# Altium PCB T4F81.PcbDoc
Units mm, origin at the board's own origin, x right, y up, seen from the top; angles counter-clockwise.
Board outline 40 x 55 mm, 4 copper layers (Top Layer, GND, PWR, Bottom Layer), stack 0.999 mm thick; 58 components, 90 nets, 333 pads, 22 vias.
Unrouted connection lines stored in the file: 201.
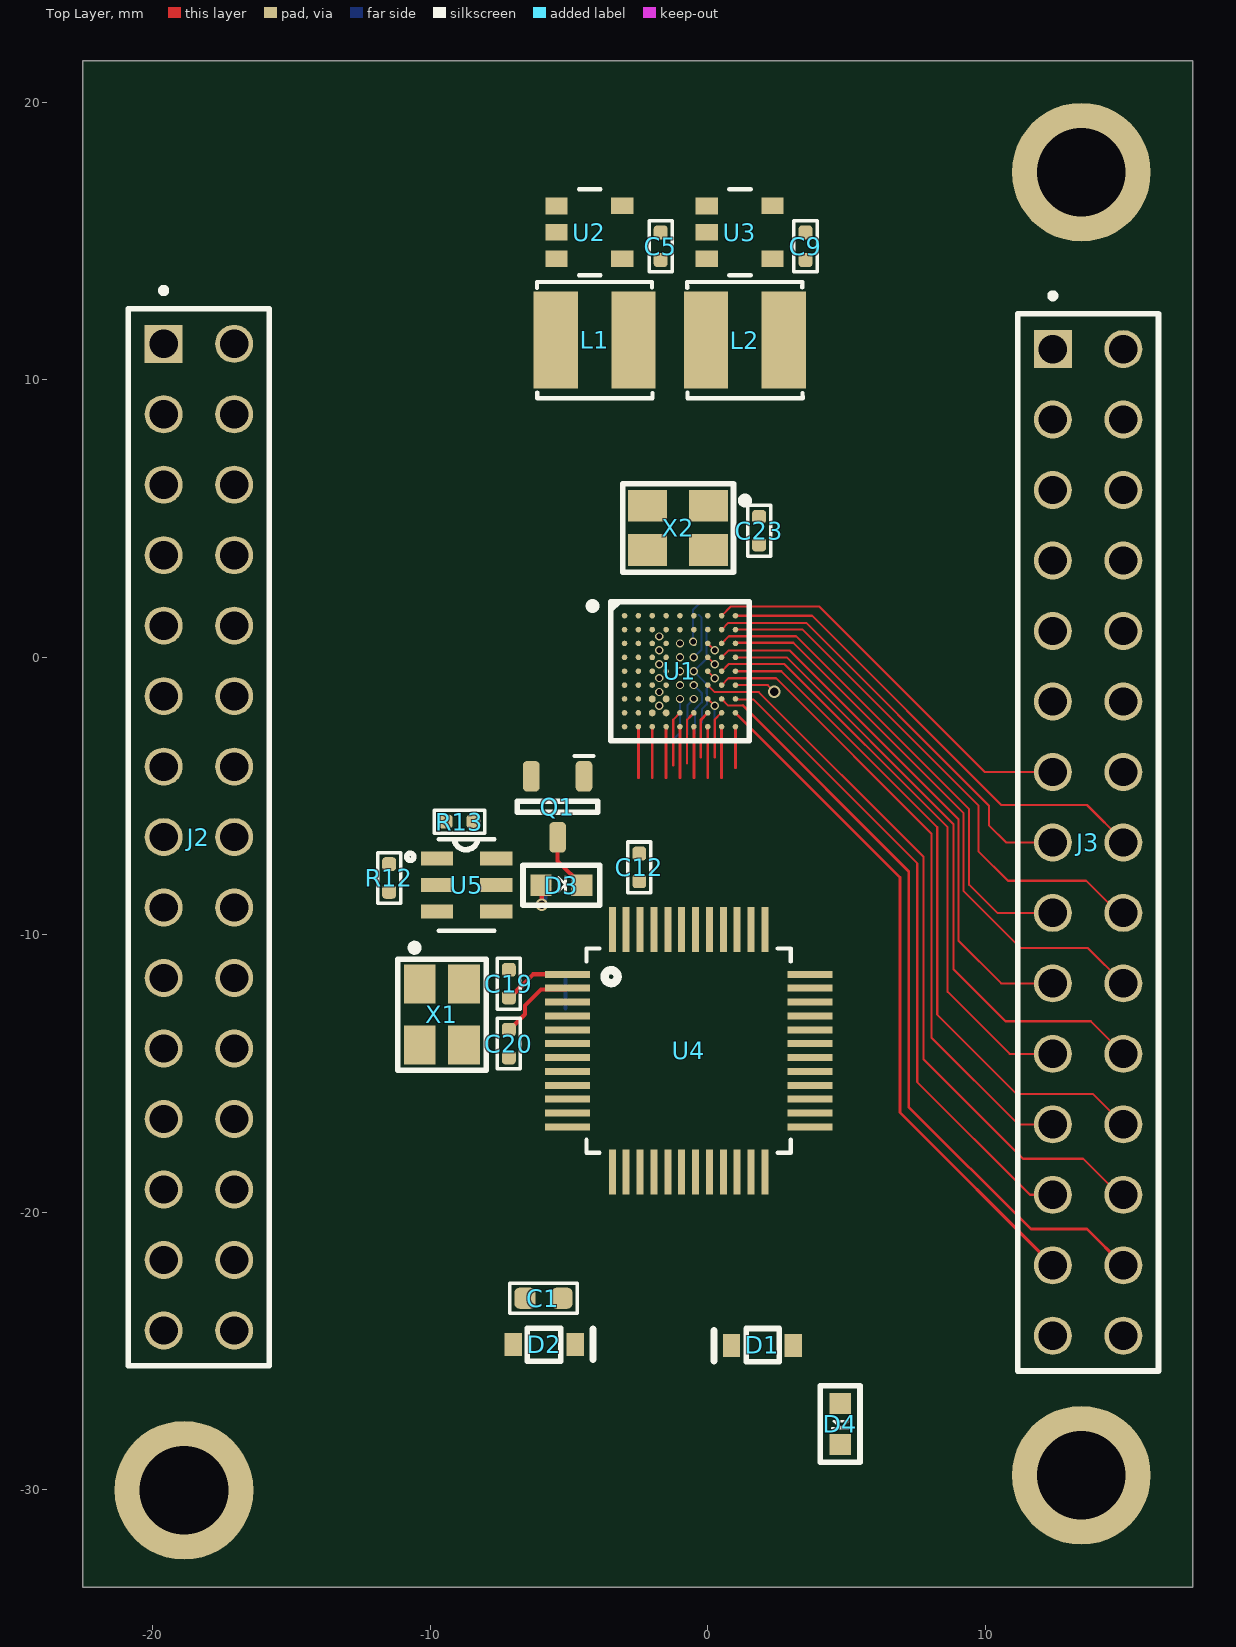
[diagram p0: Top Layer view]
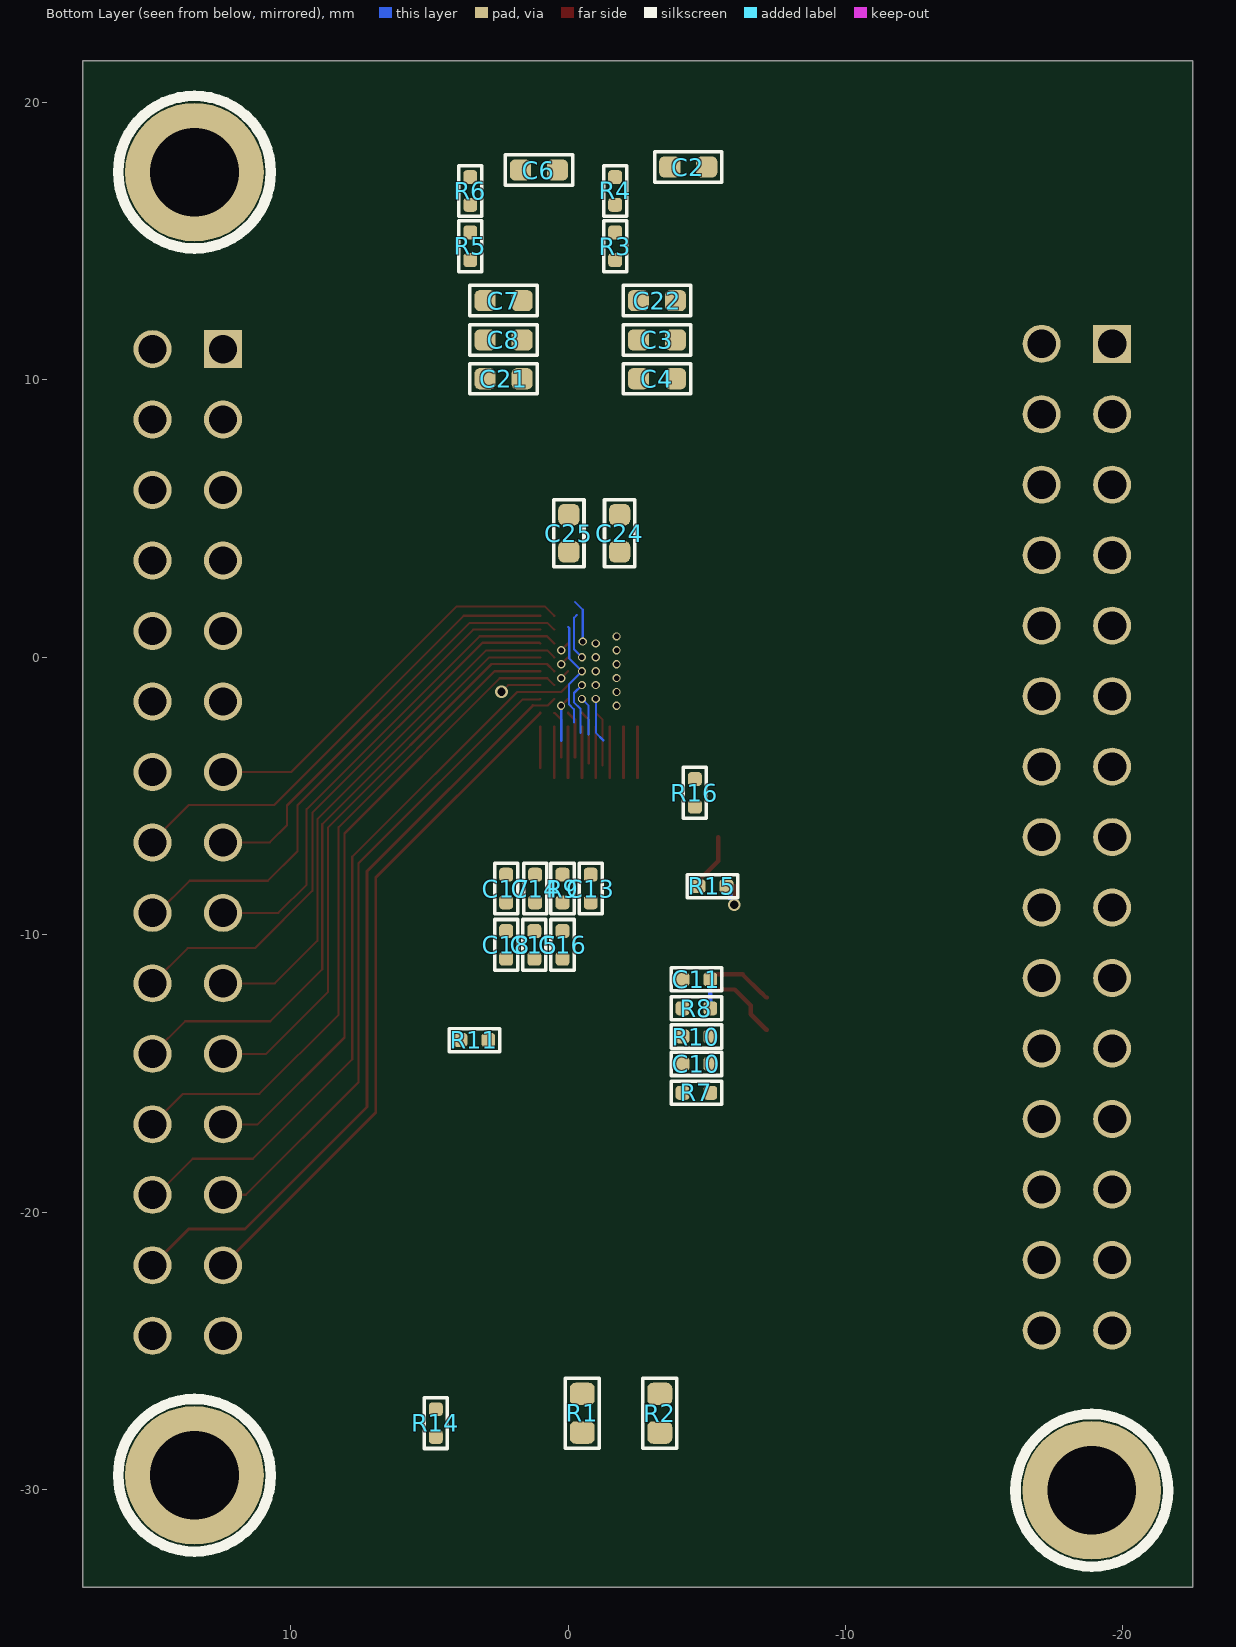
[diagram p1: Bottom Layer view, seen from below]

## Layer stack, top to bottom
Top Solder: solder mask 0.0102, Solder Resist, Dk 3.5
Top Layer: signal copper 0.035
Dielectric 2: prepreg 0.0994, PP-006, Dk 4.1
GND: signal copper 0.0152
Dielectric 1: prepreg 0.7, FR-4, Dk 4.8
PWR: signal copper 0.0152
Dielectric 3: prepreg 0.0994, PP-006, Dk 4.1
Bottom Layer: signal copper 0.035
Bottom Solder: solder mask 0.0102, Solder Resist, Dk 3.5

## Board outline
-22.517,-33.507 17.483,-33.507 17.483,21.493 -22.517,21.493

## Design rules (kind name [scope] priority, off if disabled: settings)
Clearance [All] p1: gap=0.102 ignorepadtopadclearanceinfootprint=TRUE
PolygonConnect [All] p1: connectstyle=Relief reliefconductorwidth=0.254 reliefentries=4 polygonreliefangle="90 Angle" airgapwidth=0.254
RoutingVias [All] p1: holewidth=0.711 width=1.27 viastyle="Through Hole" minholewidth=0.711 minwidth=1.27 maxholewidth=0.711 maxwidth=1.27
SolderMaskExpansion [All] p1: expansion=0.051 istentingtop=FALSE
Width [All] p1: maxlimit=0.508 minlimit=0.076 preferedwidth=0.254 minimp=50.000000 maximp=50.000000 favimp=50.000000
30 further rules are at their usual default settings.

## Classes and differential pairs
component class T4F81_FPGA: C10 C11 C12 C13 C14 C15 C16 C17 C18 C19 C20 C23 D3 J2 J3 Q1 R7 R8 R9 R10 R11 R12 R13 R15 R16 U1 U4 U5 X1 X2
component class Power: C1 C2 C3 C4 C5 C6 C7 C8 C9 C21 C22 C24 C25 D1 D2 D4 J1 L1 L2 R1 R2 R3 R4 R5 R6 R14 U2 U3

## Components (designator, comment, footprint, x,y, rotation, side; value= is the part's Value field where it differs from the comment)
C1 "Capacitor" CAPC0603 -5.924,-23.098 r180 top value=10uF
C2 "" CAPC0603 -4.331,17.67 r180 bottom value=22uF
C3 "" CAPC0603 -3.206,11.438 r0 bottom value=22uF
C4 "" CAPC0603 -3.206,10.04 r0 bottom value=22uF
C5 "" CAPC0402 -1.697,14.816 r270 top value=22pF
C6 "" CAPC0603 1.052,17.563 r180 bottom value=22uF
C7 "" CAPC0603 2.322,12.855 r0 bottom value=22uF
C8 "" CAPC0603 2.322,11.438 r0 bottom value=22uF
C9 "" CAPC0402 3.524,14.815 r270 top value=22pF
C10 "" CAPC0402 -4.626,-14.656 r180 bottom value=0.1uF
C11 "" CAPC0402 -4.626,-11.608 r180 bottom value=0.1uF
C12 "" CAPC0402 -2.467,-7.571 r270 top value=0.1uF
C13 "" CAPC0402 -0.816,-8.333 r270 bottom value=0.1uF
C14 "" CAPC0402 1.189,-8.333 r270 bottom value=10nF
C15 "" CAPC0402 1.216,-10.365 r90 bottom value=4.7uF
C16 "" CAPC0402 0.2,-10.365 r90 bottom value=0.1uF
C17 "" CAPC0402 2.232,-8.333 r270 bottom value=0.1uF
C18 "" CAPC0402 2.232,-10.365 r90 bottom value=0.1uF
C19 "" CAPC0402 -7.166,-11.762 r270 top value=22pF
C20 "" CAPC0402 -7.166,-13.921 r90 top value=22pF
C21 "" CAPC0603 2.322,10.04 r0 bottom value=22uF
C22 "" CAPC0603 -3.206,12.855 r0 bottom value=22uF
C23 "" CAPC0402 1.85,4.566 r270 top value=15pF
C24 "" CAPC0603 -1.861,4.472 r270 bottom value=22uF
C25 "" CAPC0603 -0.027,4.472 r270 bottom value=22uF
D1 "DIODE_B5819WS" sod-323 1.971,-24.8 r180 top
D2 "DIODE_B5819WS" sod-323 -5.888,-24.764 r0 top
D3 "" led_0603 -5.278,-8.212 r0 top
D4 "" led_0603 4.776,-27.632 r270 top
J1 "TYPE-C" TYPE-C 34.762,-16.915 r0 top
J2 "Header 15X2 2.54mm" Header_15X2_2.54 -19.608,11.301 r270 top
J3 "Header 15X2 2.54mm" Header_15X2_2.54 12.437,11.109 r270 top
L1 "IND_1" IND_4.0X4.0X2.0 -4.075,11.432 r0 top value=2.2uH
L2 "IND_1" IND_4.0X4.0X2.0 1.339,11.432 r0 top value=2.2uH
Q1 "" SOT23-3 -5.411,-5.414 r180 top
R1 "Resistor" RESC0603 -0.511,-27.245 r90 bottom value=4.7K
R2 "Resistor" RESC0603 -3.305,-27.245 r90 bottom value=4.7K
R3 "Res1" resc0402 -1.697,14.816 r90 bottom value=9k
R4 "Res1" resc0402 -1.697,16.809 r90 bottom value=2k
R5 "Res1" resc0402 3.524,14.816 r90 bottom value=1.2kohm
R6 "Res1" resc0402 3.524,16.809 r90 bottom value=1K
R7 "Res1" resc0402 -4.626,-15.699 r0 bottom value=0OHM
R8 "Res1" resc0402 -4.626,-12.651 r0 bottom value=0OHM
R9 "Res1" RESC0402 0.2,-8.333 r270 bottom value=10k
R10 "Res1" resc0402 -4.626,-13.667 r180 bottom value=12k
R11 "Res1" CAPC0402 3.375,-13.794 r0 bottom value=39K
R12 "Res1" resc0402 -11.484,-7.952 r270 top value=2k
R13 "Res1" resc0402 -8.944,-5.92 r180 top value=10k
R14 "Res1" resc0402 4.766,-27.6 r270 bottom value=2K
R15 "" RESC0402 -5.205,-8.251 r0 bottom value=240E
R16 "" RESC0402 -4.571,-4.885 r270 bottom value=1k
U1 "T4F81" "T4F81 fpga" -1,-0.5 r0 top
U2 "AP3429" SOT23-5 -4.202,15.242 r0 top
U3 "AP3429" SOT23-5 1.212,15.242 r0 top
U4 "FTDI" LQFP-48 -0.689,-14.175 r0 top
U5 "93LC56BT-I/OT" SOT23-6 -8.69,-8.206 r0 top
X1 "XC2426TR-ND" Crystal_3225 -9.579,-12.878 r270 top
X2 "Oscillator OT322550MJBA4SL" Crystal_3225 -1.071,4.663 r180 top

## Footprints (in the part's own frame and the unit in brackets; to place one, negate y for a bottom-side part, rotate by r counter-clockwise, add the part's x,y. Pads: shape width x height; smd on the part's side, far side on the other; paste and mask are expansions set on the pad)
CAPC0402 [mm]
  rrect50% 0.5x0.5 smd: 1(-0.5,0) 2(0.5,0)
  silkscreen extent -0.92,-0.42 0.92,0.42, body extent -0.5,-0.25 0.5,0.25, height 0.42
CAPC0603 [mil]
  rrect50% 30x30 smd: 1(-26.26,0) 2(26.26,0)
  silkscreen extent -48,-22 48,22, body extent -31,-16 32,16, height 34
Crystal_3225 [mm] "3225 pack"
  rect 1.4x1.15 smd: 1(-1.1,-0.8) 2(1.1,-0.8) 3(1.1,0.8) 4(-1.1,0.8)
  silkscreen extent -2.54,-1.6 2,1.6, body extent -1.6,-1.23 1.6,1.27, height 0.6
Header_15X2_2.54 [mm]
  rect 1.37x1.37 hole 1.02: 01(0,0)
  round 1.37 hole 1.02: 02(0,2.54) 03(2.54,0) 04(2.54,2.54) 05(5.08,0) 06(5.08,2.54) 07(7.62,0) 08(7.62,2.54) 09(10.16,0) 10(10.16,2.54) 11(12.7,0) 12(12.7,2.54) 13(15.24,0) 14(15.24,2.54) 15(17.78,0) 16(17.78,2.54) 17(20.32,0) 18(20.32,2.54) 19(22.86,0) 20(22.86,2.54) 21(25.4,0) 22(25.4,2.54) 23(27.94,0) 24(27.94,2.54) 25(30.48,0) 26(30.48,2.54) 27(33.02,0) 28(33.02,2.54) 29(35.56,0) 30(35.56,2.54)
  silkscreen extent -2.02,-1.27 36.83,3.81, body extent -1.27,-1.25 36.83,3.83, height 9.5
IND_4.0X4.0X2.0 [mm]
  rect 1.6x3.5 smd: 1(-1.4,0) 2(1.4,0)
  silkscreen extent -2.08,-2.1 2.08,2.1, body extent -2,-2 2,2, height 1.8
led_0603 [mil]
  rect 30x30 smd: A(-29.02,0) K(29.02,0)
  silkscreen extent -54,-28 54,28, body extent -32,-14 32,14, height 25
LQFP-48 [mil]
  rect 64x10 smd: 1(-172,108.27) 2(-172,88.58) 3(-172,68.9) 4(-172,49.21) 5(-172,29.53) 6(-172,9.84) 7(-172,-9.84) 8(-172,-29.53) 9(-172,-49.21) 10(-172,-68.9) 11(-172,-88.58) 12(-172,-108.27) 25(172,-108.27) 26(172,-88.58) 27(172,-68.9) 28(172,-49.21) 29(172,-29.53) 30(172,-9.84) 31(172,9.84) 32(172,29.53) 33(172,49.21) 34(172,68.9) 35(172,88.58) 36(172,108.27)
  rect 10x64 smd: 13(-108.27,-172) 14(-88.58,-172) 15(-68.9,-172) 16(-49.21,-172) 17(-29.53,-172) 18(-9.84,-172) 19(9.84,-172) 20(29.53,-172) 21(49.21,-172) 22(68.9,-172) 23(88.58,-172) 24(108.27,-172) 37(108.27,172) 38(88.58,172) 39(68.9,172) 40(49.21,172) 41(29.53,172) 42(9.84,172) 43(-9.84,172) 44(-29.53,172) 45(-49.21,172) 46(-68.9,172) 47(-88.58,172) 48(-108.27,172)
  silkscreen extent -145,-145 145,145, body extent -182,-182 182,182, height 60
resc0402 [mm]
  rrect50% 0.5x0.5 smd: 1(-0.5,0) 2(0.5,0)
  silkscreen extent -0.92,-0.42 0.91,0.42, body extent -0.5,-0.25 0.5,0.25, height 0.4
RESC0402 [mm]
  rrect50% 0.5x0.5 smd: 1(-0.5,0) 2(0.5,0)
  silkscreen extent -0.92,-0.42 0.91,0.42, body extent -0.5,-0.25 0.5,0.25, height 0.4
RESC0603 [mm]
  rrect50% 0.81x0.9 smd: 1(-0.695,0) 2(0.695,0)
  silkscreen extent -1.27,-0.62 1.27,0.62, body extent -0.8,-0.4 0.8,0.4, height 0.45
sod-323 [mm]
  rect 0.63x0.83 smd: 1(-1.115,0) 2(1.115,0)
  silkscreen extent -0.61,-0.61 1.75,0.58, body extent -1.25,-0.63 1.25,0.62, height 0.9
SOT23-3 [mm]
  rrect50% 0.6x1.1 smd: 1(-0.95,-1.125) 2(0.95,-1.125) 3(0,1.075)
  silkscreen extent -1.45,-1.86 1.45,0.17, body extent -1.5,-1.44 1.5,1.39, height 1.19
SOT23-5 [mm]
  rect 0.8x0.6 smd: 1(-1.25,1.026) 2(-1.25,0.076) 3(-1.25,-0.874) 4(1.123,-0.872) 5(1.123,1.028)
  silkscreen extent -0.44,-1.47 0.34,1.63, body extent -1.48,-1.42 1.37,1.58, height 1.3
SOT23-6 [mil]
  rect 46x20 smd paste+0 mask+0: 1(-42,37.4) 2(-42,0) 3(-42,-37.4) 4(42,-37.4) 5(42,0) 6(42,37.4)
  silkscreen extent -85,-65 40,65, body extent -59,-60 59,60, height 57
"T4F81 fpga" [mm] "BGA, 81-Leads, Body 5.00x5.00mmx0.83mm, Pitch 0.50mm"
  round 0.2 smd: A1(-2,2) A2(-1.5,2) A3(-1,2) A4(-0.5,2) A5(0,2) A6(0.5,2) A7(1,2) A8(1.5,2) A9(2,2) B1(-2,1.5) B2(-1.5,1.5) B3(-1,1.5) B4(-0.5,1.5) B5(0,1.5) B6(0.5,1.5) B7(1,1.5) B8(1.5,1.5) B9(2,1.5) C1(-2,1) C2(-1.5,1) C3(-1,1) C4(-0.5,1) C5(0,1) C6(0.5,1) C7(1,1) C8(1.5,1) C9(2,1) D1(-2,0.5) D2(-1.5,0.5) D3(-1,0.5) D4(-0.5,0.5) D5(0,0.5) D6(0.5,0.5) D7(1,0.5) D8(1.5,0.5) D9(2,0.5) E1(-2,0) E2(-1.5,0) E3(-1,0) E4(-0.5,0) E5(0,0) E6(0.5,0) E7(1,0) E8(1.5,0) E9(2,0) F1(-2,-0.5) F2(-1.5,-0.5) F3(-1,-0.5) F4(-0.5,-0.5) F5(0,-0.5) F6(0.5,-0.5) F7(1,-0.5) F8(1.5,-0.5) F9(2,-0.5) G1(-2,-1) G2(-1.5,-1) G5(0,-1) G6(0.5,-1) G7(1,-1) G8(1.5,-1) G9(2,-1) H1(-2,-1.5) H2(-1.5,-1.5) H5(0,-1.5) H6(0.5,-1.5) H7(1,-1.5) H8(1.5,-1.5) H9(2,-1.5)
  round 0.25 smd: G3(-1,-1) G4(-0.5,-1) H3(-1,-1.5) H4(-0.5,-1.5)
  round 0.2 smd mask+0.051: J1(-2,-2) J2(-1.5,-2) J3(-1,-2) J4(-0.5,-2) J5(0,-2) J6(0.5,-2) J7(1,-2) J8(1.5,-2) J9(2,-2)
  silkscreen extent -3.27,-2.5 2.5,2.5, body extent -2.5,-2.5 2.5,2.5, height 0.83
TYPE-C [mm]
  rect 0.5x1.3 smd: A1(-3.2,2.633) A4(-2.4,2.633) A9(2.4,2.633) A12(3.2,2.633)
  rect 0.28x1.3 smd: A5(-1.25,2.633) A6(-0.25,2.633) A7(0.25,2.633) A8(1.25,2.634) B5(1.75,2.633) B6(0.75,2.633) B7(-0.75,2.633) B8(-1.75,2.634)
  oval 1.1x2 hole 0.7 slot 1.6 at 90 deg: S1(-4.32,1.566) S4(4.32,1.566)
  oval 1.2x1.8 hole 0.7 slot 1.4 at 90 deg: S2(-4.32,-2.634) S3(4.32,-2.634)
  round 0.75 hole 0.75 unplated: ""(-2.89,0.956) ""(2.89,0.956)
  silkscreen extent -4.32,-5.22 4.32,1.75, body extent -4.48,-5.21 4.47,2.69, height 3.16

## Part data
C1: "Ceramic Capacitor, 10uF, 0603,10V", Case/Package=0603
C2 C3 C4 C6 C7 C8 C21 C22 C24 C25: library part Cap, "CAP CER 22uF 10V X7R 0603", Case/Package=0603, Dielectric=X7R, Manufacturer Part Number=CC0603KRX7R6BB226, Voltage=10V, Type=Capacitor, Vicharak-PN=V001478
C5 C9 C19 C20: library part Capacitor, "Ceramic Capacitor, 22pF, 0402,50V", Case/Package=0402, Voltage=50V
C10 C11 C12 C13: library part Capacitor, "Ceramic Capacitor, 0.1uF, 0402,10V", Case/Package=0402, Voltage=10V
C14: library part Capacitor, "Ceramic Capacitor, 10nF, 0402,10V", Case/Package=0402, Voltage=10V
C15: library part Capacitor, "Ceramic Capacitor, 4.7uF, 0402,10V", Case/Package=0402, Voltage=10V
C16 C17 C18: library part Capacitor, "Ceramic Capacitor, 0.1UF, 0402,10V", Case/Package=0402, Voltage=10V
C23: library part Capacitor, "Ceramic Capacitor, 15pF, 0402,50V", Case/Package=0402, Voltage=50V
D1 D2: "Schottky Barrier£¬B5819WS SOD-323", Case/Package=SOD-323, Manufacturer Part Number=B5819WS, Vicharak-PN=V000203
D3: library part LED1, "GREEN LED, 0603", Case/Package=0603, Manufacturer Part Number=GREEN
D4: library part LED1, "RED LED 0603", Case/Package=0603, Manufacturer Part Number=GREEN
J1: Case/Package=SMD, Manufacturer Part Number=C167321, Type="TYPE -C  CONNECTOR"
J2 J3: "Connector Header position", Case/Package=TH, Manufacturer Part Number="Th P2.54MM"
L1 L2: "2.2uH, 48mOhm, 4.35A, 6.12A, ±20%, SMD,4x4x2mm, Power Inductor (MWPY4020L-2R2M-T) (C2934996)", Manufacturer Part Number=MWPY4020L-2R2M-T, Package=SMD,4x4mm, Type=INDUCTOR, Vicharak-PN=V001341
Q1: library part "MOSFET Si2302CDS", "N-Channel 20V 3A 1.25W (Ta) Surface Mount SOT-23", Case/Package=SOT-23, Manufacturer Part Number=SI2302-TP
R1 R2: "Thick Film Resistor -  4.7Kohm, 1%, 0603", Case/Package=0603
R3: "Thick Film Resistor -  9Kohm, 1%, 0402", Case/Package=0402, Tolerance=1%, Type=Resistor, Vicharak-PN=V000698
R4: "Thick Film Resistor -  2Kohm, 1%, 0402", Case/Package=0402, Tolerance=1%, Type=Resistor, Vicharak-PN=V000698
R5: "Thick Film Resistor -  1.2kohm, 1%, 0402", Case/Package=0402, Tolerance=1%, Type=Resistor, Vicharak-PN=V000360
R6: "Thick Film Resistor -  1Kohm, 1%, 0402", Case/Package=0402, Manufacturer Part Number=0402WGF1001TCE, Tolerance=1%, Type=Resistor, Vicharak-PN=V000698
R7: "Thick Film Resistor -  0ohm, 1%, 0402", Case/Package=0402, Manufacturer Part Number=RC0402FR-070RL, ComponentLink1Description=http://uk.rs-online.com/webdocs/0d98/0900766b80d98824.pdf?src-supplier=RSComponents, ComponentLink1URL=http://uk.rs-online.com/webdocs/0d98/0900766b80d98824.pdf?src-supplier=RSComponents, ComponentLink2Description=http://www.vishay.com/docs/20035/dcrcwe3.pdf?src-supplier=Digi-Key, ComponentLink2URL=http://www.vishay.com/docs/20035/dcrcwe3.pdf?src-supplier=Digi-Key, ComponentLink3Description=http://www.farnell.com/datasheets/2045673.pdf?src-supplier=Element14, ComponentLink3URL=http://www.farnell.com/datasheets/2045673.pdf?src-supplier=Element14, ComponentLink4Description=http://www.vishay.com/docs/20035/dcrcwe3.pdf?src-supplier=Avnet, ComponentLink4URL=http://www.vishay.com/docs/20035/dcrcwe3.pdf?src-supplier=Avnet, ComponentLink5Description=https://www.distrelec.biz/Web/Downloads/a_/en/flD-CRCW-e3_data_en.pdf?mime=application%2Fpdf&src-supplier=Distrelec, ComponentLink5URL=https://www.distrelec.biz/Web/Downloads/a_/en/flD-CRCW-e3_data_en.pdf?mime=application%2Fpdf&src-supplier=Distrelec, ComponentLink6Description=http://www.vishay.com/docs/20035/dcrcwe3.pdf?src-supplier=Mouser, ComponentLink6URL=http://www.vishay.com/docs/20035/dcrcwe3.pdf?src-supplier=Mouser, ComponentLink7Description=http://www.farnell.com/datasheets/2111203.pdf?src-supplier=Element14, ComponentLink7URL=http://www.farnell.com/datasheets/2111203.pdf?src-supplier=Element14, ComponentLink8Description=http://www.vishay.com/docs/20035/dcrcwe3.pdf?src-supplier=Future+Electronics, ComponentLink8URL=http://www.vishay.com/docs/20035/dcrcwe3.pdf?src-supplier=Future+Electronics, ComponentLink9Description=https://www.te.com/commerce/DocumentDelivery/DDEController?Action=srchrtrv&amp;DocNm=1773204-3&amp;DocType=DS&amp;DocLang=English&src-supplier=Digi-Key, ComponentLink9URL=https://www.te.com/commerce/DocumentDelivery/DDEController?Action=srchrtrv&amp;DocNm=1773204-3&amp;DocType=DS&amp;DocLang=English&src-supplier=Digi-Key, ComponentLink10Description=https://4donline.ihs.com/images/VipMasterIC/IC/TYEL/TYEL-S-A0004929575/TYEL-S-A0004929575-1.pdf?hkey=52A5661711E402568146F3353EA87419&src-supplier=Farnell, ComponentLink10URL=https://4donline.ihs.com/images/VipMasterIC/IC/TYEL/TYEL-S-A0004929575/TYEL-S-A0004929575-1.pdf?hkey=52A5661711E402568146F3353EA87419&src-supplier=Farnell, ComponentLink11Description=https://4donline.ihs.com/images/VipMasterIC/IC/TYEL/TYEL-S-A0004929575/TYEL-S-A0004929575-1.pdf?hkey=52A5661711E402568146F3353EA87419&src-supplier=Newark, ComponentLink11URL=https://4donline.ihs.com/images/VipMasterIC/IC/TYEL/TYEL-S-A0004929575/TYEL-S-A0004929575-1.pdf?hkey=52A5661711E402568146F3353EA87419&src-supplier=Newark
R8: "Thick Film Resistor -  0ohm, 1%, 0402", Case/Package=0402, ComponentLink1Description=http://uk.rs-online.com/webdocs/0d98/0900766b80d98824.pdf?src-supplier=RSComponents, ComponentLink1URL=http://uk.rs-online.com/webdocs/0d98/0900766b80d98824.pdf?src-supplier=RSComponents, ComponentLink2Description=http://www.vishay.com/docs/20035/dcrcwe3.pdf?src-supplier=Digi-Key, ComponentLink2URL=http://www.vishay.com/docs/20035/dcrcwe3.pdf?src-supplier=Digi-Key, ComponentLink3Description=http://www.farnell.com/datasheets/2045673.pdf?src-supplier=Element14, ComponentLink3URL=http://www.farnell.com/datasheets/2045673.pdf?src-supplier=Element14, ComponentLink4Description=http://www.vishay.com/docs/20035/dcrcwe3.pdf?src-supplier=Avnet, ComponentLink4URL=http://www.vishay.com/docs/20035/dcrcwe3.pdf?src-supplier=Avnet, ComponentLink5Description=https://www.distrelec.biz/Web/Downloads/a_/en/flD-CRCW-e3_data_en.pdf?mime=application%2Fpdf&src-supplier=Distrelec, ComponentLink5URL=https://www.distrelec.biz/Web/Downloads/a_/en/flD-CRCW-e3_data_en.pdf?mime=application%2Fpdf&src-supplier=Distrelec, ComponentLink6Description=http://www.vishay.com/docs/20035/dcrcwe3.pdf?src-supplier=Mouser, ComponentLink6URL=http://www.vishay.com/docs/20035/dcrcwe3.pdf?src-supplier=Mouser, ComponentLink7Description=http://www.farnell.com/datasheets/2111203.pdf?src-supplier=Element14, ComponentLink7URL=http://www.farnell.com/datasheets/2111203.pdf?src-supplier=Element14, ComponentLink8Description=http://www.vishay.com/docs/20035/dcrcwe3.pdf?src-supplier=Future+Electronics, ComponentLink8URL=http://www.vishay.com/docs/20035/dcrcwe3.pdf?src-supplier=Future+Electronics, ComponentLink9Description=https://www.te.com/commerce/DocumentDelivery/DDEController?Action=srchrtrv&amp;DocNm=1773204-3&amp;DocType=DS&amp;DocLang=English&src-supplier=Digi-Key, ComponentLink9URL=https://www.te.com/commerce/DocumentDelivery/DDEController?Action=srchrtrv&amp;DocNm=1773204-3&amp;DocType=DS&amp;DocLang=English&src-supplier=Digi-Key, ComponentLink10Description=https://4donline.ihs.com/images/VipMasterIC/IC/TYEL/TYEL-S-A0004929575/TYEL-S-A0004929575-1.pdf?hkey=52A5661711E402568146F3353EA87419&src-supplier=Farnell, ComponentLink10URL=https://4donline.ihs.com/images/VipMasterIC/IC/TYEL/TYEL-S-A0004929575/TYEL-S-A0004929575-1.pdf?hkey=52A5661711E402568146F3353EA87419&src-supplier=Farnell, ComponentLink11Description=https://4donline.ihs.com/images/VipMasterIC/IC/TYEL/TYEL-S-A0004929575/TYEL-S-A0004929575-1.pdf?hkey=52A5661711E402568146F3353EA87419&src-supplier=Newark, ComponentLink11URL=https://4donline.ihs.com/images/VipMasterIC/IC/TYEL/TYEL-S-A0004929575/TYEL-S-A0004929575-1.pdf?hkey=52A5661711E402568146F3353EA87419&src-supplier=Newark
R9 R13: "Thick Film Resistor -  10Kohm, 1%, 0402", Case/Package=0402
  R9: ComponentLink1Description=http://uk.rs-online.com/webdocs/0d98/0900766b80d98824.pdf?src-supplier=RSComponents, ComponentLink1URL=http://uk.rs-online.com/webdocs/0d98/0900766b80d98824.pdf?src-supplier=RSComponents, ComponentLink2Description=http://www.vishay.com/docs/20035/dcrcwe3.pdf?src-supplier=Digi-Key, ComponentLink2URL=http://www.vishay.com/docs/20035/dcrcwe3.pdf?src-supplier=Digi-Key, ComponentLink3Description=http://www.farnell.com/datasheets/2045673.pdf?src-supplier=Element14, ComponentLink3URL=http://www.farnell.com/datasheets/2045673.pdf?src-supplier=Element14, ComponentLink4Description=http://www.vishay.com/docs/20035/dcrcwe3.pdf?src-supplier=Avnet, ComponentLink4URL=http://www.vishay.com/docs/20035/dcrcwe3.pdf?src-supplier=Avnet, ComponentLink5Description=https://www.distrelec.biz/Web/Downloads/a_/en/flD-CRCW-e3_data_en.pdf?mime=application%2Fpdf&src-supplier=Distrelec, ComponentLink5URL=https://www.distrelec.biz/Web/Downloads/a_/en/flD-CRCW-e3_data_en.pdf?mime=application%2Fpdf&src-supplier=Distrelec, ComponentLink6Description=http://www.vishay.com/docs/20035/dcrcwe3.pdf?src-supplier=Mouser, ComponentLink6URL=http://www.vishay.com/docs/20035/dcrcwe3.pdf?src-supplier=Mouser, ComponentLink7Description=http://www.farnell.com/datasheets/2111203.pdf?src-supplier=Element14, ComponentLink7URL=http://www.farnell.com/datasheets/2111203.pdf?src-supplier=Element14, ComponentLink8Description=http://www.vishay.com/docs/20035/dcrcwe3.pdf?src-supplier=Future+Electronics, ComponentLink8URL=http://www.vishay.com/docs/20035/dcrcwe3.pdf?src-supplier=Future+Electronics, ComponentLink9Description=https://www.te.com/commerce/DocumentDelivery/DDEController?Action=srchrtrv&amp;DocNm=1773204-3&amp;DocType=DS&amp;DocLang=English&src-supplier=Digi-Key, ComponentLink9URL=https://www.te.com/commerce/DocumentDelivery/DDEController?Action=srchrtrv&amp;DocNm=1773204-3&amp;DocType=DS&amp;DocLang=English&src-supplier=Digi-Key, ComponentLink10Description=https://4donline.ihs.com/images/VipMasterIC/IC/TYEL/TYEL-S-A0004929575/TYEL-S-A0004929575-1.pdf?hkey=52A5661711E402568146F3353EA87419&src-supplier=Farnell, ComponentLink10URL=https://4donline.ihs.com/images/VipMasterIC/IC/TYEL/TYEL-S-A0004929575/TYEL-S-A0004929575-1.pdf?hkey=52A5661711E402568146F3353EA87419&src-supplier=Farnell, ComponentLink11Description=https://4donline.ihs.com/images/VipMasterIC/IC/TYEL/TYEL-S-A0004929575/TYEL-S-A0004929575-1.pdf?hkey=52A5661711E402568146F3353EA87419&src-supplier=Newark, ComponentLink11URL=https://4donline.ihs.com/images/VipMasterIC/IC/TYEL/TYEL-S-A0004929575/TYEL-S-A0004929575-1.pdf?hkey=52A5661711E402568146F3353EA87419&src-supplier=Newark
R10: "Thick Film Resistor -  12Kohm, 1%, 0402", Case/Package=0402, ComponentLink1Description=http://uk.rs-online.com/webdocs/0d98/0900766b80d98824.pdf?src-supplier=RSComponents, ComponentLink1URL=http://uk.rs-online.com/webdocs/0d98/0900766b80d98824.pdf?src-supplier=RSComponents, ComponentLink2Description=http://www.vishay.com/docs/20035/dcrcwe3.pdf?src-supplier=Digi-Key, ComponentLink2URL=http://www.vishay.com/docs/20035/dcrcwe3.pdf?src-supplier=Digi-Key, ComponentLink3Description=http://www.farnell.com/datasheets/2045673.pdf?src-supplier=Element14, ComponentLink3URL=http://www.farnell.com/datasheets/2045673.pdf?src-supplier=Element14, ComponentLink4Description=http://www.vishay.com/docs/20035/dcrcwe3.pdf?src-supplier=Avnet, ComponentLink4URL=http://www.vishay.com/docs/20035/dcrcwe3.pdf?src-supplier=Avnet, ComponentLink5Description=https://www.distrelec.biz/Web/Downloads/a_/en/flD-CRCW-e3_data_en.pdf?mime=application%2Fpdf&src-supplier=Distrelec, ComponentLink5URL=https://www.distrelec.biz/Web/Downloads/a_/en/flD-CRCW-e3_data_en.pdf?mime=application%2Fpdf&src-supplier=Distrelec, ComponentLink6Description=http://www.vishay.com/docs/20035/dcrcwe3.pdf?src-supplier=Mouser, ComponentLink6URL=http://www.vishay.com/docs/20035/dcrcwe3.pdf?src-supplier=Mouser, ComponentLink7Description=http://www.farnell.com/datasheets/2111203.pdf?src-supplier=Element14, ComponentLink7URL=http://www.farnell.com/datasheets/2111203.pdf?src-supplier=Element14, ComponentLink8Description=http://www.vishay.com/docs/20035/dcrcwe3.pdf?src-supplier=Future+Electronics, ComponentLink8URL=http://www.vishay.com/docs/20035/dcrcwe3.pdf?src-supplier=Future+Electronics, ComponentLink9Description=https://www.te.com/commerce/DocumentDelivery/DDEController?Action=srchrtrv&amp;DocNm=1773204-3&amp;DocType=DS&amp;DocLang=English&src-supplier=Digi-Key, ComponentLink9URL=https://www.te.com/commerce/DocumentDelivery/DDEController?Action=srchrtrv&amp;DocNm=1773204-3&amp;DocType=DS&amp;DocLang=English&src-supplier=Digi-Key, ComponentLink10Description=https://4donline.ihs.com/images/VipMasterIC/IC/TYEL/TYEL-S-A0004929575/TYEL-S-A0004929575-1.pdf?hkey=52A5661711E402568146F3353EA87419&src-supplier=Farnell, ComponentLink10URL=https://4donline.ihs.com/images/VipMasterIC/IC/TYEL/TYEL-S-A0004929575/TYEL-S-A0004929575-1.pdf?hkey=52A5661711E402568146F3353EA87419&src-supplier=Farnell, ComponentLink11Description=https://4donline.ihs.com/images/VipMasterIC/IC/TYEL/TYEL-S-A0004929575/TYEL-S-A0004929575-1.pdf?hkey=52A5661711E402568146F3353EA87419&src-supplier=Newark, ComponentLink11URL=https://4donline.ihs.com/images/VipMasterIC/IC/TYEL/TYEL-S-A0004929575/TYEL-S-A0004929575-1.pdf?hkey=52A5661711E402568146F3353EA87419&src-supplier=Newark
R11: "Thick Film Resistor -  39Kohm, 1%, 0402", Case/Package=0402
R12 R14: "Thick Film Resistor -  2Kohm, 1%, 0402", Case/Package=0402
R15: library part Res, "Thick Film Resistor -  240ohm, 1%, 0402", Case/Package=0402
R16: library part Res, "Thick Film Resistor -  1Kohm, 1%, 0402", Case/Package=0402
U2: "Buck Switching Regulator IC Positive Adjustable 0.6V 1 Output 2A SOT-23-5 Thin, TSOT-23-5", Manufacturer Part Number=AP3429AKTTR-G1, Package=SOT-23-5, Type=IC, Vicharak-PN=V001301
U3: "Buck Switching Regulator IC Positive Adjustable 0.6V 1 Output 2A SOT-23-5 Thin, TSOT-23-5", Package=SOT-23-5, Type=IC, Vicharak-PN=V001301
U4: library part FT232HL, "FT232HL, 1.62V~1.98V,  2.97V~3.63V, 24mA, 48Pin, 48-LQFP, USB Bridge, USB to UART, FIFO, Controller", Case/Package=LQFP-48_7x7x05P, Manufacturer Part Number=FT232HL-REEL, Type=IC, Vicharak-PN=V001843
U5: "MICROCHIP - 93LC56BT-I/OT. - 2K, 128 X 16, SERIAL EE, IND ROHS COMPLIANT: YES", Case/Package=SOT-23-6, ComponentLink1Description=https://datasheet.ciiva.com/48496/jp013939-48496476.pdf?src-supplier=Avnet, ComponentLink1URL=https://datasheet.ciiva.com/48496/jp013939-48496476.pdf?src-supplier=Avnet, ComponentLink2Description=https://datasheet.ciiva.com/16216/filehandler-aspxddocname-en013939-16216574.pdf?src-supplier=Future+Electronics, ComponentLink2URL=https://datasheet.ciiva.com/16216/filehandler-aspxddocname-en013939-16216574.pdf?src-supplier=Future+Electronics, ComponentLink3Description=https://datasheet.ciiva.com/3185/jp013939-3185519.pdf?src-supplier=Avnet, ComponentLink3URL=https://datasheet.ciiva.com/3185/jp013939-3185519.pdf?src-supplier=Avnet, ComponentLink4Description=https://datasheet.ciiva.com/16622/jp013939-16622127.pdf?src-supplier=Avnet+Europe, ComponentLink4URL=https://datasheet.ciiva.com/16622/jp013939-16622127.pdf?src-supplier=Avnet+Europe, Manufacturer Part Number=93LC56BT-I/OT, Type=EEPROM, Vicharak-PN=V001522
X1: library part CRYSTAL_1_1, "CRYSTAL 12.0000MHZ 10PF SMD", Case/Package=SMD-3225, Frequency=12MHz, Manufacturer Part Number=ECS-120-10-33B-CKM-TR
X2: "1.8V~3.3V -40℃~+85℃ ±10ppm 50MHz SMD3225-4P Oscillators ROHS (OT322550MJBA4SL) (C717684)", Case/Package=SMD3225, Frequency=50MHz, Manufacturer Part Number=OT322550MJBA4SL, Vicharak-PN=V000176
U1: Manufacturer_Part_Number=T4F81

## Free pads (board coordinates)
  round 5 hole 3.2: 2(-18.876,-30.022) 2(-16.078,58.199) 2(13.465,-29.48) 2(13.465,17.486) 2(40.11,119.549)

## Via types
v1: diameter 0.3, hole 0.2, Top Layer to Bottom Layer, tented both sides, 20 vias
v2: diameter 0.457, hole 0.3, Top Layer to Bottom Layer, tented both sides, 2 vias

## Nets (pads, with @x,y where several pads share a name; then routed paths per layer and width w, separated by ;. In a path a pad name is that pad's centre, name@x,y a point inside that pad or via, vN(x,y) a via of type N, cw(c..) or ccw(c..) an arc to the next point about the centre after c; other vN are vias at no path point)
1V1: C7.2 C8.2 C9.2 C21.2 C24.2 L2.2 R5.1 U1.A1 U1.C1 U1.D4 U1.E5 U1.F2 U1.F9 | length 1.5
  Top Layer w0.076: U1.F9 2.162,-1 v2(2.398,-1.237)
  other v1: -1,-0.5
3V3: C3.2 C4.2 C5.2 C22.2 C23.2 C25.2 L1.2 R3.1 R13.1 R15.2 U1.A7 U1.B2 U1.H7 U1.J1 U5.6 X2.1 X2.4 | length 1.7
  Top Layer w0.097: -0.25,-3.599 -0.25,-2.25 U1.H7@-0.002,-2.002
CDONE: Q1.1 R16.1 U1.H5 | length 2
  Top Layer w0.076: -1.244,-3.895 -1.244,-2.244 U1.H5
CRESET_N: J2.27 U1.J5 | length 1.8
  Top Layer w0.102: -1,-4.337 U1.J5
GND: C1.2 C2.1 C3.1 C4.1 C6.1 C7.1 C8.1 C10.1 C11.1 C12.1 C13.1 C15.1 C16.1 C17.1 C18.1 C19.1 C20.1 C21.1 C22.1 C23.1 C24.1 C25.1 D1.1 D2.1 D4.K J1.A1 J1.A12 J1.S1 J1.S2 J1.S3 J1.S4 J2.28 J3.24 J3.29 J3.30 Q1.2 R1.1 R2.1 R4.2 R6.2 R10.1 R16.2 U1.A2 U1.B1 U1.B7 U1.D1 U1.D5 U1.E4 U1.E9 U1.G2 U1.G7 U1.H1 U2.2 U3.2 U4.4 U4.9 U4.10 U4.11 U4.22 U4.23 U4.35 U4.36 U4.41 U4.42 U4.47 U4.48 U5.2 X1.2 X1.4 X2.2 | length 26.3
  Top Layer w0.076: U1.G7 v1(0.252,-1.75) ; U1.E9 2.65,-0.5 8.27,-6.12 8.27,-12.877 11.124,-15.731 13.877,-15.731 J3.24
  Bottom Layer w0.076: 0.247,-3.019 0.247,-1.755 v1(0.252,-1.75)
  other v1: -1,0
GPIOL_00: J2.13 U1.G5 | length 1.6
  Bottom Layer w0.076: -1.278,-3 -1,-2.722 v1(-1,-1.5)
GPIOL_01_SS_N: J2.12 U1.J4 | length 1.8
  Top Layer w0.102: -1.5,-4.337 U1.J4
GPIOL_02_CCK: J2.15 U1.H4
GPIOL_03_CDI4: J2.14 U1.G4
  other v1: -1.748,-1.75
GPIOL_04_CDI0: J2.21 U1.F4
GPIOL_05_CDI5: J2.06 U1.J3 | length 1.8
  Top Layer w0.102: -2,-4.337 U1.J3
GPIOL_06_CDI1: J2.07 U1.H3
GPIOL_07_CDI6: J2.08 U1.G3
GPIOL_09_CDI2: J2.09 U1.J2 | length 1.8
  Top Layer w0.102: -2.5,-4.337 U1.J2
GPIOL_10_CDI7: J2.10 U1.H2
GPIOL_11_CDI3: J2.11 J3.17 U1.C8 U1.F3 | length 17.8
  Top Layer w0.076: U1.C8 0.76,0.76 3.187,0.76 9.423,-5.476 9.423,-8.195 10.439,-9.211 J3.17
GPIOL_12_CTRL0: J2.19 U1.G1
GPIOL_13_CTRL1: J2.17 U1.F1
GPIOL_14_CLK0: J2.20 U1.E2
GPIOL_15_CLK1: J2.18 U1.E1
GPIOL_16_CLK2: J2.16 U1.C2
GPIOL_17_CLK3: J2.01 U1.D2
GPIOL_18_CTRL2: J2.02 U1.E3
GPIOL_19_CTRL3: J2.03 U1.D3
GPIOL_20_PLLIN: J2.04 U1.C3 X2.3
GPIOL_21_NSTATUS: J2.05 U1.B3
GPIOR_00: J3.02 U1.A5
GPIOR_01: J3.01 U1.B5
GPIOR_02_RESERVED_OUT: J3.03 U1.C5
  other v1: -1,0.5
GPIOR_03: J3.04 U1.A6
GPIOR_05: J3.06 U1.B6
GPIOR_06: J3.05 U1.C6 | length 1.5
  Bottom Layer w0.076: v1(-0.53,0.569) -0.53,1.714 -0.244,2
GPIOR_07: J3.07 U1.C7 | length 0.4
  Top Layer w0.076: U1.C7 v1(0.25,0.25)
GPIOR_08: J3.13 U1.A8 | length 14.5
  Top Layer w0.076: U1.A8 0.839,1.839 4.009,1.839 9.979,-4.131 J3.13
GPIOR_10: J3.16 U1.A9 | length 17.4
  Top Layer w0.076: U1.A9 3.763,1.5 10.585,-5.322 13.669,-5.322 14.977,-6.63 J3.16
GPIOR_11: J3.15 U1.B8 | length 15.7
  Top Layer w0.076: U1.B8 0.744,1.244 3.547,1.244 10.13,-5.339 10.13,-6.051 10.75,-6.671 J3.15
GPIOR_12: J3.12 U1.D6 | length 1.7
  Bottom Layer w0.076: v1(-0.5,0) -0.22,0.28 -0.22,1.429 -0.322,1.531
GPIOR_13: J3.18 U1.B9 | length 19.2
  Top Layer w0.076: U1.B9 3.418,1 9.753,-5.335 9.753,-6.985 10.822,-8.053 13.638,-8.053 14.796,-9.211 J3.18
GPIOR_14: J3.20 U1.C9 | length 20.7
  Top Layer w0.076: U1.C9 1.024,0.524 1.106,0.524 3.085,0.524 9.215,-5.606 9.215,-8.414 11.281,-10.48 13.706,-10.48 J3.20
GPIOR_15_CBUS0: J3.14 U1.D7 | length 0.4
  Top Layer w0.076: U1.D7 v1(0.25,-0.25)
GPIOR_16_CTRL7_CBUS1: J3.19 U1.D8 | length 19.6
  Top Layer w0.076: U1.D8 0.753,0.253 2.948,0.253 9.037,-5.836 9.037,-10.215 10.573,-11.751 J3.19
GPIOR_17_CTRL6_CBUS2: J3.22 U1.D9 | length 23
  Top Layer w0.076: U1.D9 2.842,0 8.859,-6.017 8.859,-11.244 10.732,-13.117 13.802,-13.117 J3.22
GPIOR_18_CLK7: J3.21 U1.E8 | length 21.3
  Top Layer w0.076: U1.E8 0.76,-0.24 2.758,-0.24 8.645,-6.128 8.645,-12.055 10.881,-14.291 J3.21
GPIOR_19_CLK6: J3.23 U1.F8 | length 23
  Top Layer w0.076: U1.F8 0.744,-0.756 2.464,-0.756 8.058,-6.349 8.058,-13.701 11.188,-16.831 J3.23
GPIOR_20_CLK5: J3.08 U1.E7 | length 0.4
  Top Layer w0.076: U1.E7 v1(0.25,-0.75)
GPIOR_21_CLK4_CBSEL1: J3.26 U1.F7 | length 26.9
  Top Layer w0.076: U1.F7 0.253,-1.253 1.843,-1.253 7.777,-7.187 7.777,-14.486 11.364,-18.073 13.53,-18.073 14.829,-19.371 J3.26
GPIOR_22_CTRL5: J3.11 U1.E6 | length 3.9
  Bottom Layer w0.076: -0.21,-2.351 -0.21,-1.871 -0.032,-1.694 -0.032,-1.311 -0.038,-1.306 -0.038,-1.13 -0.032,-1.125 -0.032,-0.968 v1(-0.5,-0.5) -0.041,-0.041 -0.041,1.06 -0.001,1.1
GPIOR_23_CTRL4: J3.09 U1.F6 | length 1.9
  Bottom Layer w0.076: v1(-0.5,-1) -0.215,-1.285 -0.215,-1.38 -0.21,-1.385 -0.21,-1.62 -0.455,-1.865 -0.455,-2.726
GPIOR_25: U1.F5
  other v1: -1,-1
GPIOR_26_CBSEL0: J3.25 U1.G9 | length 23.5
  Top Layer w0.076: U1.G9 1.015,-1.515 1.639,-1.515 7.551,-7.427 7.551,-15.309 11.613,-19.371 J3.25
GPIOR_27: J3.27 U1.H9 | length 24.6
  Top Layer w0.102: U1.H9 6.929,-7.929 6.929,-16.403 J3.27
GPIOR_28: J2.30 U1.J9 | length 1.5
  Top Layer w0.102: 1,-3.978 U1.J9
GPIOR_30: J2.29 U1.J8 | length 1.8
  Top Layer w0.102: 0.5,-4.337 U1.J8
GPIOR_31: J3.28 U1.G8 | length 27.9
  Top Layer w0.076: U1.G8 0.74,-1.74 1.27,-1.74
  Top Layer w0.102: 1.27,-1.74 7.242,-7.711 7.242,-16.203 11.645,-20.607 13.672,-20.607 J3.28
GPIOR_32: J2.25 U1.H8 | length 1.7
  Top Layer w0.076: 0.251,-2.24 0.491,-2 U1.H8
  Top Layer w0.089: 0.251,-3.602 0.251,-2.24
GPIOR_34_CSI: J2.22 U1.J7 | length 1.8
  Top Layer w0.102: 0,-4.337 U1.J7
GPIOR_35_CSO: J3.10 U1.G6 | length 1.4
  Bottom Layer w0.076: -0.732,-2.772 -0.732,-1.732 v1(-0.5,-1.5)
GPIOR_36: J2.24 U1.H6 | length 1.9
  Top Layer w0.076: -0.745,-3.818 -0.745,-2.245 -0.651,-2.151
  Top Layer w0.102: -0.651,-2.151 U1.H6
GPIOR_37_TEST_N: J2.23 U1.J6 | length 1.8
  Top Layer w0.102: -0.5,-4.337 U1.J6
NetC5_1: C5.1 R3.2 R4.1 U2.5
NetC9_1: C9.1 R5.2 R6.1 U3.5
NetC10_2: C10.2 R7.1 U4.8
NetC11_2: C11.2 R8.1 U4.3 | length 1
  Bottom Layer w0.152: R8.1 C11.2
NetC14_1: C14.1 R9.1 U4.34
NetC17_2: C17.2 U4.38
NetC18_2: C18.2 U4.37
NetC19_2: C19.2 U4.1 X1.1 | length 2.5
  Top Layer w0.152: C19.2 -7.14,-12.262 -6.966,-12.088 -6.956,-12.088 -6.293,-11.425 U4.1
NetC20_2: C20.2 U4.2 X1.3 | length 2.9
  Top Layer w0.152: C20.2 -7.141,-13.421 -6.586,-12.866 -6.586,-12.546 -6.007,-11.968 -5.101,-11.968 U4.2
NetD3_A: D3.A R15.1 | length 1.5
  Top Layer w0.076: D3.A D3.A@-5.986,-8.241
  Top Layer w0.152: v2(-5.986,-8.916) D3.A@-5.986,-8.241
  Bottom Layer w0.152: v2(-5.986,-8.916) -5.986,-8.833 -5.849,-8.696 -5.849,-8.395 R15.1
NetD3_K: D3.K Q1.3 | length 2.1
  Top Layer w0.152: Q1.3 -5.411,-7.342 D3.K
NetD4_A: D4.A R14.2
NetJ1_A5: J1.A5 R2.2
NetJ1_B5: J1.B5 R1.2
NetL1_1: L1.1 U2.3
NetL2_1: L2.1 U3.3
NetR10_2: R10.2 U4.5
NetR12_1: R12.1 R13.2 U5.1
NetR12_2: R12.2 U4.43 U5.3
NetU4_44: U4.44 U5.4
NetU4_45: U4.45 U5.5
TCK: U1.C4 U4.13
TDI: U1.A3 U4.14
TDO: U1.A4 U4.15
TMS: U1.B4 U4.16
USB_N: J1.A7 J1.B7 U4.6
USB_P: J1.A6 J1.B6 U4.7
VBUS: C1.1 C2.2 C6.2 C13.2 D1.2 D2.2 J1.A4 J1.A9 R11.1 R14.1 U2.1 U2.4 U3.1 U3.4 U4.40
VBUSDTCT: R11.2 U4.31
VCCD: C14.2 C15.2 C16.2 R7.2 R8.2 R9.2 U4.39
VIO: C12.2 U4.12 U4.24 U4.46
pads on no net: J1. J1.A8 J1.B8 J2.26 U4.17 U4.18 U4.19 U4.20 U4.21 U4.25 U4.26 U4.27 U4.28 U4.29 U4.30 U4.32 U4.33
copper on no net:
  other v1: -1.748,-1.25 -1.748,-0.748 -1.748,-0.248 -1.748,0.252 -1.748,0.752

## Silkscreen, mask and mechanical layers (free items; w line width, h text height)
Bottom Overlay:
  circle w0.381: c-18.876,-30.022 r2.75
  circle w0.381: c13.465,-29.48 r2.75
  circle w0.381: c13.465,17.486 r2.75
Top 3D Body:
  lines w0.025: 36.039,73.725 36.039,123.725 76.039,123.725 76.039,73.725 36.039,73.725
  lines w0.2: -28.221,27.353 -28.221,55.492 ; -20.137,30.314 ccw(c-16.206,30.314) -16.206,26.382 ; -20.136,58.453 cw(c-16.205,58.453) -16.205,62.384 4.933,62.384 cw(c4.933,58.453) 8.864,58.453 ; -16.205,26.382 4.933,26.382 ccw(c4.933,30.313) 8.864,30.313 8.864,58.453 ; 36.052,119.803 cw(c39.983,119.803) 39.983,123.734